# EAGLE board CT_schematic (EAGLE 7.6.0)

Size 100 x 80 mm. Coordinates in mm from the lower left corner, seen from the top.
Outline: 0,0 100,0 100,80 0,80 0,0
Copper layers (1*16): Top 0.035mm / dielectric 1.5mm / Bottom 0.035mm
Design rules "default": minimum track width 10mil, minimum drill 24mil, track to track 8mil, track to pad 8mil, pad to pad 8mil, via to via 8mil, smd to smd 8mil, copper to edge 40mil, drill to drill 8mil, minimum pad ring 10mil, minimum via ring 8mil, stop-mask expansion 4mil, vias tented up to drill 0mil, thermal gap 10mil

## Footprints (pad centres in the part's own frame; a part is rotated, then mirrored left to right if it is on the bottom)
C0603 = smd 0.8 x 0.8: 1 -0.762,0; 2 0.762,0
C0402 = smd 0.5 x 0.5: 1 -0.508,0; 2 0.508,0
C1210 = smd 1.2 x 2.5: 1 -1.524,0; 2 1.524,0
R0603 = smd 0.8 x 0.8: 1 -0.762,0; 2 0.762,0
EXV-9H = smd 3.505 x 1.676: 1 -2.857,0; 2 2.857,0
L0603 = smd 0.8 x 0.8: 1 -0.762,0; 2 0.762,0
IND25X25CZ = smd 2.489 x 3.429: 1 -2.718,0; 2 2.718,0
PJ-037B_PACKAGE = drill 3.7 square: 1 12,0 | drill 3.2 square: 2 6,0
WLCSP25 = smd 0.32 x 0.32: A1 -0.8,0.8; A2 -0.4,0.8; A3 0,0.8; A4 0.4,0.8; A5 0.8,0.8; B1 -0.8,0.4; B2 -0.4,0.4; B3 0,0.4; B4 0.4,0.4; B5 0.8,0.4; C1 -0.8,0; C2 -0.4,0; C3 0,0; C4 0.4,0; C5 0.8,0; D1 -0.8,-0.4; D2 -0.4,-0.4; D3 0,-0.4; D4 0.4,-0.4; D5 0.8,-0.4; E1 -0.8,-0.8; E2 -0.4,-0.8; E3 0,-0.8; E4 0.4,-0.8; E5 0.8,-0.8
SOIC-8 = smd 1.6 x 0.6: 1 -2.7,1.905 | smd 1.55 x 0.6: 2 -2.7,0.635; 3 -2.7,-0.635; 4 -2.7,-1.905; 5 2.7,-1.905; 6 2.7,-0.635; 7 2.7,0.635; 8 2.7,1.905
AT24C02D = smd 1.6 x 0.6: 1 -2.475,1.905 | smd 1.55 x 0.6: 2 -2.475,0.635; 3 -2.475,-0.635; 4 -2.475,-1.905; 5 2.475,-1.905; 6 2.475,-0.635; 7 2.475,0.635; 8 2.475,1.905
ABLS-25.000MHZ-B2F-T = smd 5.6 x 2.8: 1 -3.81,0; 2 5.69,0
IR3899MTR1PBF = smd 0.25 x 0.75: 1 0,0; 2 0.5,0; 3 1,0; 4 1.5,0; 5 2,0; 6 2.5,0; 7 3,0 | smd 0.75 x 0.25: 8 3.425,0.78; 9 3.425,1.28; 10 3.425,1.78; 14 -0.425,1.78; 15 -0.425,1.28; 16 -0.425,0.78 | smd 0.3 x 1.95: 11 3.22,3.63 | smd 1.62 x 2.42: 12 1.786,3.8 | smd 1 x 1.95: 13 0.117,3.63 | smd 2.19 x 1.25: 17 1.51,1.26
SON-6 = smd 0.55 x 0.3: 1 -0.355,0.5 | smd 0.52 x 0.3: 2 -0.37,0; 3 -0.37,-0.5; 4 0.37,-0.5; 5 0.37,0; 6 0.37,0.5
SW_4-1437565-2 = smd 1.4 x 2.1: 1 -2.23,4.55; 2 -2.23,-4.55; 3 2.23,4.55; 4 2.23,-4.55
LGM67K-G1J2-24-Z = smd 0.8 x 1.4: A -2,0; C 0,0
NC7SZ125M5X = smd 1.3 x 0.7: 1 -1.3,0.95; 2 -1.3,0; 3 -1.3,-0.95; 4 1.3,-0.95; 5 1.3,0.95

## Placement (x,y rotation side)
C1  1e-07  [C0603]  -36.83,52.07 0 top  (outside the outline)
C2  4.7e-06  [C0603]  -29.21,52.07 0 top  (outside the outline)
C3  1e-08  [C0603]  -40.64,52.07 0 top  (outside the outline)
C4  1e-06  [C0603]  -44.45,52.07 0 top  (outside the outline)
C5  1e-11  [C0402]  -30.48,57.15 0 top  (outside the outline)
C6  1e-11  [C0402]  -34.29,57.15 0 top  (outside the outline)
C7  1e-08  [C0402]  -38.1,57.15 0 top  (outside the outline)
C8  1e-08  [C0402]  -41.91,57.15 0 top  (outside the outline)
C9  0.0001  [C1210]  -29.21,35.56 0 top  (outside the outline)
C10  2.2e-06  [C0603]  -33.02,52.07 0 top  (outside the outline)
C11  1e-07  [C0402]  -45.72,57.15 0 top  (outside the outline)
C12  1e-07  [C0402]  -49.53,57.15 0 top  (outside the outline)
C13  8.5935703950126e-09  [R0603]  -45.72,34.29 0 top  (outside the outline)
C14  2.929626271027e-07  [R0603]  -54.61,34.29 0 top  (outside the outline)
C17  1e-07  [C0402]  -53.34,57.15 0 top  (outside the outline)
C18  0.0001  [EXV-9H]  -52.07,19.05 0 top  (outside the outline)
C19  0.0001  [EXV-9H]  -17.78,27.94 0 top  (outside the outline)
C20  1e-08  [C0402]  -57.15,57.15 0 top  (outside the outline)
F1  240.0  [L0603]  -48.26,52.07 0 top  (outside the outline)
I1  6.8e-07  [IND25X25CZ]  -48.26,27.94 0 top  (outside the outline)
J1  PJ-037B  [PJ-037B_PACKAGE]  -27.94,7.62 0 top  (outside the outline)
R1  10000.0  [R0603]  -57.15,41.91 0 top  (outside the outline)
R2  1000.0  [R0603]  -52.07,52.07 0 top  (outside the outline)
R3  1270.0  [R0603]  -55.88,52.07 0 top  (outside the outline)
R4  4700.0  [R0603]  -59.69,52.07 0 top  (outside the outline)
R5  2200.0  [R0603]  -15.24,57.15 0 top  (outside the outline)
R6  2200.0  [R0603]  -19.05,57.15 0 top  (outside the outline)
R7  10000.0  [R0603]  -15.24,46.99 0 top  (outside the outline)
R8  10000.0  [R0603]  -20.32,46.99 0 top  (outside the outline)
R9  10000.0  [R0603]  -25.4,46.99 0 top  (outside the outline)
R10  10000.0  [R0603]  -30.48,46.99 0 top  (outside the outline)
R11  10000.0  [R0603]  -35.56,46.99 0 top  (outside the outline)
R12  10000.0  [R0603]  -40.64,46.99 0 top  (outside the outline)
R13  10000.0  [R0603]  -45.72,46.99 0 top  (outside the outline)
R14  10000.0  [R0603]  -50.8,46.99 0 top  (outside the outline)
R15  0.1  [R0603]  -22.86,57.15 0 top  (outside the outline)
R16  4030.2416170974  [R0603]  -19.05,41.91 0 top  (outside the outline)
R17  1007.5604042744  [R0603]  -26.67,41.91 0 top  (outside the outline)
R18  59.319518072289  [R0603]  -34.29,41.91 0 top  (outside the outline)
R19  130.0  [R0603]  -26.67,57.15 0 top  (outside the outline)
R20  39000.0  [R0603]  -55.88,46.99 0 top  (outside the outline)
R21  49900.0  [R0603]  -60.96,46.99 0 top  (outside the outline)
R22  5216.2133333333  [R0603]  -41.91,41.91 0 top  (outside the outline)
R23  10000.0  [R0603]  -15.24,52.07 0 top  (outside the outline)
R24  10000.0  [R0603]  -20.32,52.07 0 top  (outside the outline)
R25  18000.0  [R0603]  -25.4,52.07 0 top  (outside the outline)
R26  470000.0  [R0603]  -46.99,41.91 0 top  (outside the outline)
R27  120000.0  [R0603]  -52.07,41.91 0 top  (outside the outline)
U1  stm32f031e6y7  [WLCSP25]  -25.4,60.96 0 top  (outside the outline)
U2  AT25040B-SSHL-T  [SOIC-8]  -41.91,19.05 0 top  (outside the outline)
U3  AT24C02D-SSHM-T  [AT24C02D]  -25.4,19.05 0 top  (outside the outline)
U4  ABLS-25.000MHZ-B2F-T  [ABLS-25.000MHZ-B2F-T]  -36.83,27.94 0 top  (outside the outline)
U5  IR3899MTR1PBF  [IR3899MTR1PBF]  -60.96,3.81 0 top  (outside the outline)
U6  TPS3895ADRYR  [SON-6]  -27.94,60.96 0 top  (outside the outline)
U7  4-1437565-2  [SW_4-1437565-2]  -44.45,6.35 0 top  (outside the outline)
U8  Q65110A2395  [LGM67K-G1J2-24-Z]  -17.78,35.56 0 top  (outside the outline)
U9  nc7sz125m5x  [NC7SZ125M5X]  -34.29,34.29 0 top  (outside the outline)

## Library data of the parts
C1-C14 C17-C20 F1 I1 J1 R1-R27 U1-U9 = circuit_tree

## Nets
CLK_CRYSTAL_U1_A5: C5.1 U1.A5 U4.1
CLK_CRYSTAL_U1_B5: C6.1 U1.B5 U4.2
GND: C1.2 C2.2 C3.2 C4.2 C5.2 C6.2 C7.2 C8.2 C10.2 C11.2 C12.2 C17.2 C18.2 C19.2 C20.2 J1.2 R2.2 R7.2 R11.2 R13.2 R14.2 R15.1 R15.2 R17.2 R20.2 R22.2 R25.2 R27.2 U1.E1 U2.4 U3.4 U5.4 U5.11 U5.17 U6.2 U8.C U9.1 U9.3
NET_U1_A3: R6.1 U1.A3 U3.5
NET_U1_A4: R7.1 U1.A4
NET_U1_B2: R5.1 U1.B2 U3.6
NET_U1_C5: R4.1 U1.C5 U9.4
NET_U1_D5: C3.1 C4.1 F1.1 U1.D5
NET_U1_E4: R3.1 U1.E4 U8.A
NET_U1_E5: R1.1 U1.E5 U7.3 U7.4
NET_U2_3: R8.1 U2.3
NET_U2_7: R10.1 U2.7
NET_U3_1: R12.1 U3.1
NET_U3_2: R13.1 U3.2
NET_U3_3: R14.1 U3.3
NET_U3_7: R11.1 U3.7
NET_U5_1: C13.1 R16.1 R17.1 R18.1 R19.1 U5.1 U5.8
NET_U5_2: C12.1 U5.2
NET_U5_3: C13.2 C14.1 C14.2 U5.3
NET_U5_5: R20.1 U5.5
NET_U5_10: C10.1 U5.10
NET_U5_12: C9.1 I1.1 U5.12
NET_U5_13: U5.13
NET_U5_14: C9.2 U5.14
NET_U5_15: R21.1 R22.1 U5.15
NET_U5_ATNET_3: I1.2 R16.2
NET_U5_ATNET_4: C14.2 R18.2
NET_U5_ATNET_5: R19.2
NET_U6_1: R24.1 R25.1 U6.1
NET_U6_3: R26.2 R27.1 U6.3
NET_U6_4: R23.1 U6.4 U9.2
NET_U7_1: R2.1 U7.1 U7.2
PROC_SPI1_MISO: U1.D3 U2.2
PROC_SPI1_MOSI: U1.C2 U2.5
PROC_SPI1_NSS: R9.1 U1.B3 U2.1
PROC_SPI1_SCK: U1.C3 U2.6
VCC_S1_16V6: C11.1 C18.1 C19.1 J1.1 R21.2 U5.9
VCC_TIER1_2V5: C1.1 C2.1 C7.1 C8.1 C17.1 C20.1 F1.2 I1.2 R1.2 R3.2 R4.2 R5.2 R6.2 R8.2 R9.2 R10.2 R12.2 R16.2 R23.2 R24.2 R26.1 U1.D1 U2.8 U3.8 U6.6 U9.5

## Tracks (layer width: path | path; a pad name or v marks a point on that pad's centre or on a via)
CLK_CRYSTAL_U1_A5  (2 unrouted)
CLK_CRYSTAL_U1_B5  (2 unrouted)
GND  (37 unrouted)
NET_U1_A3  (2 unrouted)
NET_U1_A4  (1 unrouted)
NET_U1_B2  (2 unrouted)
NET_U1_C5  (2 unrouted)
NET_U1_D5  (3 unrouted)
NET_U1_E4  (2 unrouted)
NET_U1_E5  (3 unrouted)
NET_U2_3  (1 unrouted)
NET_U2_7  (1 unrouted)
NET_U3_1  (1 unrouted)
NET_U3_2  (1 unrouted)
NET_U3_3  (1 unrouted)
NET_U3_7  (1 unrouted)
NET_U5_1  (6 unrouted)
NET_U5_2  (1 unrouted)
NET_U5_3  (3 unrouted)
NET_U5_5  (1 unrouted)
NET_U5_10  (1 unrouted)
NET_U5_12  (2 unrouted)
NET_U5_14  (1 unrouted)
NET_U5_15  (2 unrouted)
NET_U5_ATNET_3  (1 unrouted)
NET_U5_ATNET_4  (1 unrouted)
NET_U6_1  (2 unrouted)
NET_U6_3  (2 unrouted)
NET_U6_4  (2 unrouted)
NET_U7_1  (2 unrouted)
PROC_SPI1_MISO  (1 unrouted)
PROC_SPI1_MOSI  (1 unrouted)
PROC_SPI1_NSS  (2 unrouted)
PROC_SPI1_SCK  (1 unrouted)
VCC_S1_16V6  (5 unrouted)
VCC_TIER1_2V5  (25 unrouted)